# EAGLE board pmod-dual-bar-graph (EAGLE 7.4.0)
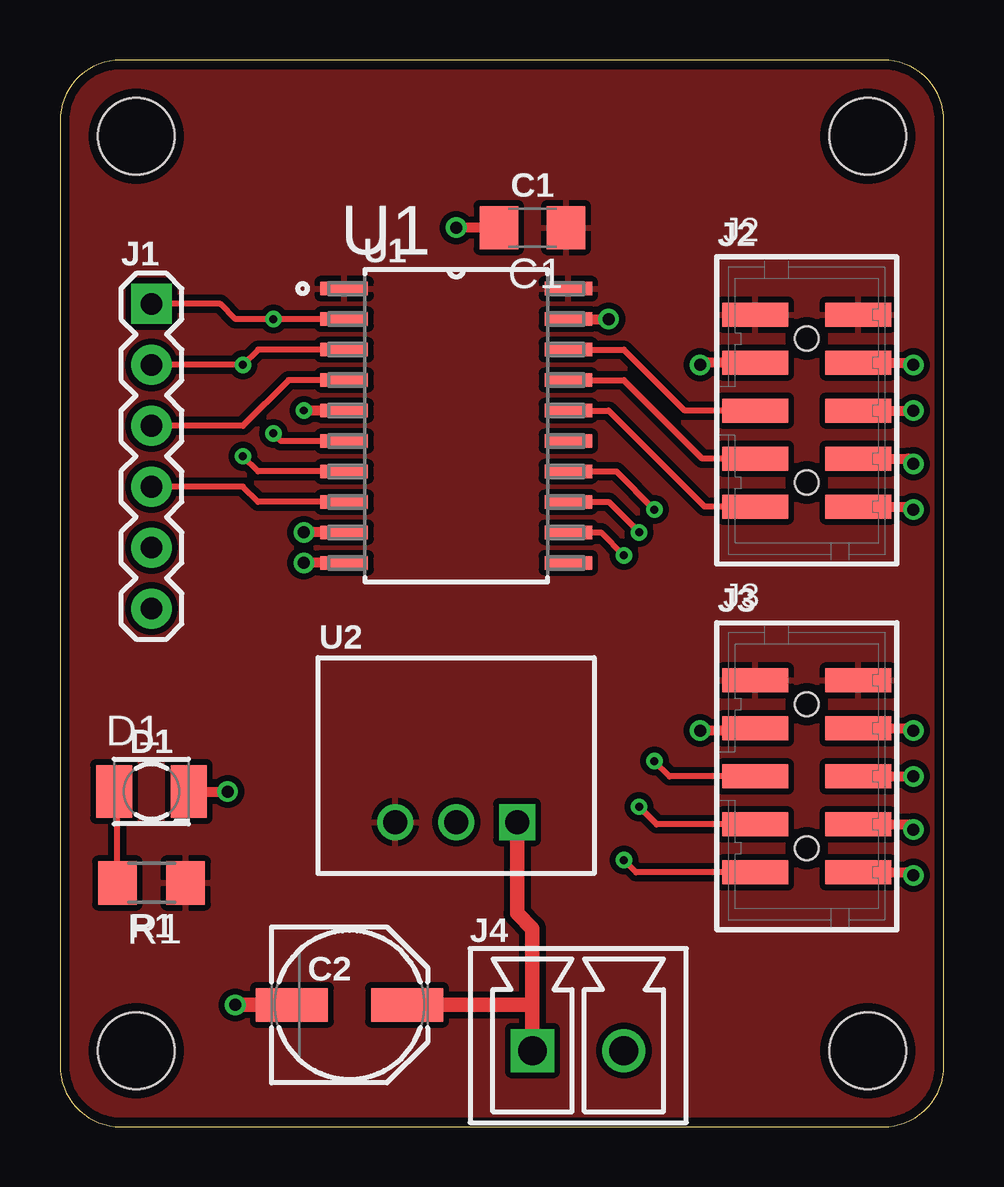
[diagram p0: board, top side]
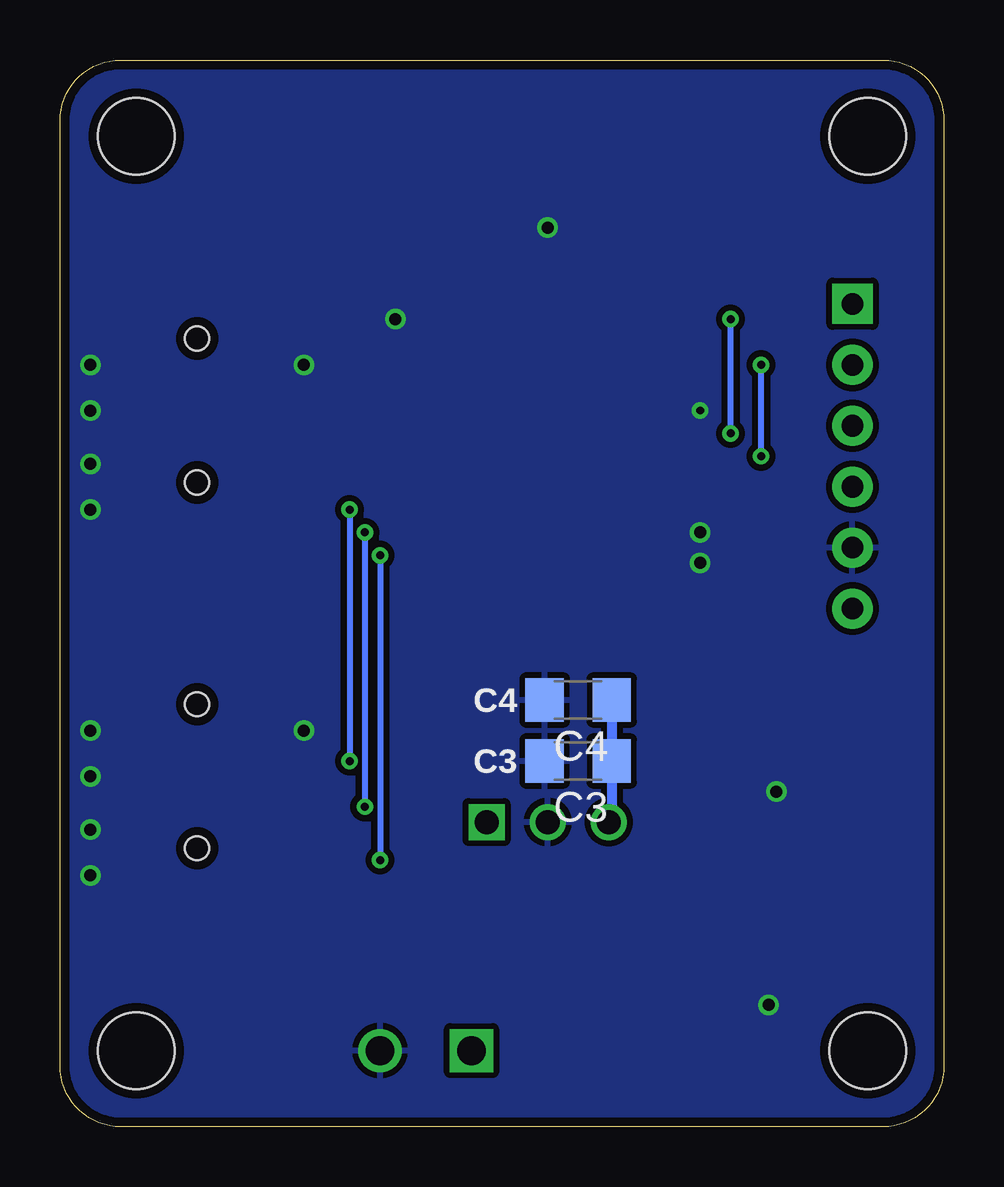
[diagram p1: board, bottom side, seen from below]

Size 36.83 x 44.45 mm. Coordinates in mm from the lower left corner, seen from the top.
Outline: 0,41.91 0,2.54 arc90 2.54,0 34.29,0 arc90 36.83,2.54 36.83,41.91 arc90 34.29,44.45 2.54,44.45 arc90 0,41.91
Copper layers (1*16): Top 0.0356mm / dielectric 1.5011mm / Bottom 0.0356mm
Design rules "LaenPCBOrder": minimum track width 6mil, minimum drill 13mil, track to track 6mil, track to pad 6mil, pad to pad 6mil, via to via 6mil, smd to smd 6mil, copper to edge 15mil, drill to drill 6mil, minimum pad ring 7mil, minimum via ring 7mil, stop-mask expansion 4mil, vias tented up to drill 0mil, thermal gap 10mil
Holes 3.2 mm at 3.17,3.17 3.17,41.27 33.66,41.27 33.66,3.17

## Footprints (pad centres in the part's own frame; a part is rotated, then mirrored left to right if it is on the bottom)
C1206 = smd 1.6 x 1.8: 1 -1.4,0; 2 1.4,0
PANASONIC_D = smd 3 x 1.4: + 2.4,0; - -2.4,0
KA-3528ASYC = smd 1.5 x 2.2: A -1.55,0; C 1.55,0
CON-PMOD-1X6 = drill 0.9 pad 1.676 square: 1 0,6.35 | drill 0.9 pad 1.676: 2 0,3.81; 3 0,1.27; 4 0,-1.27; 5 0,-3.81; 6 0,-6.35
87832-10 = smd 1 x 2.75: 1 -4,-2.15; 2 -4,2.15; 3 -2,-2.15; 4 -2,2.15; 5 0,-2.15; 6 0,2.15; 7 2,-2.15; 8 2,2.15; 9 4,-2.15; 10 4,2.15 | hole 1: -3,0; 3,0
CON-PHOENIX-1803426-3.81-1X2 = drill 1.2 square: 1 0,0 | drill 1.2: 2 3.81,0
R1206 = smd 1.6 x 1.803: 1 -1.422,0; 2 1.422,0
SOIC127P1030X265-20N = smd 1.981 x 0.559: 1 -4.674,5.715; 2 -4.674,4.445; 3 -4.674,3.175; 4 -4.674,1.905; 5 -4.674,0.635; 6 -4.674,-0.635; 7 -4.674,-1.905; 8 -4.674,-3.175; 9 -4.674,-4.445; 10 -4.674,-5.715; 11 4.674,-5.715; 12 4.674,-4.445; 13 4.674,-3.175; 14 4.674,-1.905; 15 4.674,-0.635; 16 4.674,0.635; 17 4.674,1.905; 18 4.674,3.175; 19 4.674,4.445; 20 4.674,5.715
CUI-78XX-1000 = drill 1 square: 1 -2.54,0 | drill 1: 2 0,0; 3 2.54,0

## Placement (x,y rotation side)
C1  0.1uF  [C1206]  19.68,37.47 180 top
C2  10uF 50V 20%  [PANASONIC_D]  12.06,5.08 0 top
C3  10uF 16V 20% 1206  [C1206]  15.24,15.24 180 bottom
C4  0.1uF  [C1206]  15.24,17.78 180 bottom
D1  AA3528ES  [KA-3528ASYC]  3.81,13.97 0 top
J1  PMOD-1X6-GENERIC  [CON-PMOD-1X6]  3.81,27.94 0 top
J2  87832-1010/1020 or 87759-1015  [87832-10]  31.11,29.84 270 top
J3  87832-1010/1020 or 87759-1015  [87832-10]  31.11,14.61 270 top
J4  1803426  [CON-PHOENIX-1803426-3.81-1X2]  19.68,3.17 0 top
R1  1k  [R1206]  3.81,10.16 180 top
U1  SN74LVC245ADW  [SOIC127P1030X265-20N]  16.51,29.21 0 top
U2  CUI-V7803-1000  [CUI-78XX-1000]  16.51,12.7 180 top

## Library data of the parts
C1-C4 R1 = rcl
D1 = led
J1 J4 = 0GlenConnectors
J2 J3 = con-molex; OC_FARNELL: unknown; OC_NEWARK: unknown
U1 = Texas Instruments_By_element14_Batch_1; MPN: SN74LVC245ADW; OC_FARNELL: 1102983; OC_NEWARK: 76C4247; PACKAGE: SOIC-20; SUPPLIER: Texas Instruments
U2 = GlenPartsLibrary

## Nets
+3V3: C1.1 C3.1 C4.1 J2.1 J2.2 J3.1 J3.2 R1.1 U1.1 U1.20 U2.3
+24V: C2.+ J4.1 U2.1
/BG0_SELECT: J2.9 U1.16
/BG1_SELECT: J3.9 U1.12
/SS0: J1.3 U1.4
/SS1: J1.4 U1.8
BG0_CLK: J2.7 U1.17
BG0_DATA: J2.5 U1.18
BG1_CLK: J3.7 U1.13
BG1_DATA: J3.5 U1.14
GND: C1.2 C2.- C3.2 C4.2 D1.C J1.5 J2.3 J2.4 J2.6 J2.8 J2.10 J3.3 J3.4 J3.6 J3.8 J3.10 J4.2 U1.5 U1.9 U1.10 U1.19 U2.2
MOSI: J1.1 U1.2 U1.6
N$31: D1.A R1.2
SCLK: J1.2 U1.3 U1.7

## Tracks (layer width: path | path; a pad name or v marks a point on that pad's centre or on a via)
+3V3
  Bottom 0.406: C4.1 C3.1 13.84,12.83 U2.3
  pour Top (isolate 0.254): 0,44.45 0,0 36.83,0 36.83,44.45
+24V
  Top 0.61: U2.1 19.05,8.89 19.68,8.26 19.68,5.08 | 19.68,5.08 J4.1 | C2.+ 19.68,5.08
/BG0_SELECT
  Top 0.254: U1.16 22.86,29.84 26.86,25.84 J2.9
/BG1_SELECT  (via drill 0.33)
  Top 0.254: U1.12 22.54,24.77 v23.5,23.81 | J3.9 24,10.61 v23.5,11.11
  Bottom 0.254: v23.5,23.81 v23.5,11.11
/SS0
  Top 0.254: U1.4 9.53,31.11 7.62,29.21 J1.3
/SS1
  Top 0.254: U1.8 8.26,26.04 7.62,26.67 J1.4
BG0_CLK
  Top 0.254: U1.17 23.5,31.11 26.77,27.84 J2.7
BG0_DATA
  Top 0.254: U1.18 23.5,32.38 26.04,29.84 J2.5
BG1_CLK  (via drill 0.33)
  Top 0.254: U1.13 22.86,26.04 v24.13,24.77 | J3.7 24.86,12.61 v24.13,13.34
  Bottom 0.254: v24.13,24.77 v24.13,13.34
BG1_DATA  (via drill 0.33)
  Top 0.254: U1.14 23.18,27.3 v24.77,25.72 | J3.5 25.4,14.61 v24.77,15.24
  Bottom 0.254: v24.77,25.72 v24.77,15.24
GND  (via drill 0.33, 0.5)
  Top 0.406: J2.4 35.47,31.84 v35.56,31.75 | J2.6 v35.56,29.84 | J2.8 35.34,27.84 v35.56,27.62 | J2.10 35.43,25.84 v35.56,25.72 | J3.4 35.47,16.61 v35.56,16.51 | J3.6 v35.56,14.61 | J3.8 35.34,12.61 v35.56,12.38 | J3.10 35.43,10.61 v35.56,10.48 | J2.3 26.77,31.84 v26.67,31.75 | J3.3 29.11,16.61 29.21,16.51 v26.67,16.51 | U1.19 v22.86,33.66 | C1.2 v16.51,37.47 | U1.5 v10.16,29.84 | U1.9 v10.16,24.77 | U1.10 v10.16,23.5 | D1.C v6.99,13.97
  Top 0.61: C2.- v7.3,5.08
  pour Bottom (isolate 0.254): 0,44.45 0,0 36.83,0 36.83,44.45
MOSI  (via drill 0.33)
  Top 0.254: U1.2 v8.89,33.66 7.3,33.66 6.67,34.29 J1.1 | U1.6 9.21,28.57 v8.89,28.89
  Bottom 0.254: v8.89,28.89 v8.89,33.66
N$31
  Top 0.254: R1.2 2.39,13.84 D1.A
SCLK  (via drill 0.33)
  Top 0.254: U1.3 8.26,32.38 v7.62,31.75 J1.2 | U1.7 8.26,27.3 v7.62,27.94
  Bottom 0.254: v7.62,27.94 v7.62,31.75

## Text on the board
_tsilk: C1 | J2 | J1 | U1 | J3 | U2 | D1 | R1 | J4 | C2
_bsilk: C4 | C3